# EAGLE board BatteryPCB2997 (EAGLE 7.2.0)
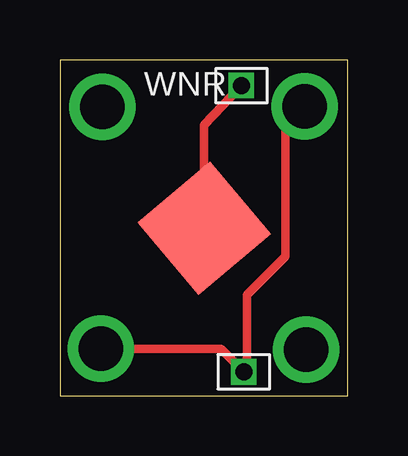
[diagram p0: board, top side]
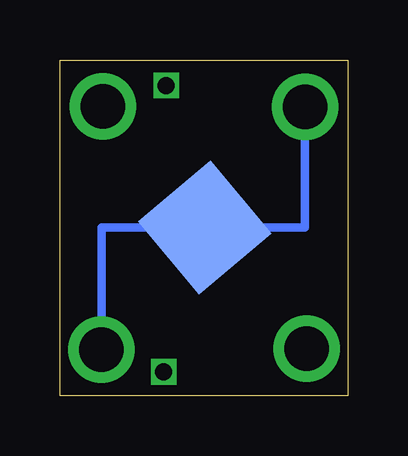
[diagram p1: board, bottom side, seen from below]

Size 12 x 14 mm. Coordinates in mm from the lower left corner, seen from the top.
Outline: 0,0 12,0 12,14 0,14 0,0
Copper layers (1*16): Top 0.035mm / dielectric 1.5mm / Bottom 0.035mm
Design rules "MF_Standard_2_Layer": minimum track width 6mil, minimum drill 12mil, track to track 6mil, track to pad 6mil, pad to pad 6mil, via to via 6mil, smd to smd 0mil, copper to edge 10mil, drill to drill 10mil, minimum pad ring 6mil, minimum via ring 6mil, stop-mask expansion 2mil, vias tented up to drill 25mil, thermal gap 10mil

## Footprints (pad centres in the part's own frame; a part is rotated, then mirrored left to right if it is on the bottom)
SAMTEC_FTS-101-03-S = drill 0.711 square: 1 0,0
2997 = smd 3.96 x 3.96: NEG 0,0 | drill 1.85: P0S2 6.605,0; POS1 -6.605,0

## Placement (x,y rotation side)
GND  FTS-101-03-L-S  [SAMTEC_FTS-101-03-S]  7.57,12.93 90 top
U$3  2997  [2997]  5.96,7.01 130 bottom
U$4  2997  [2997]  6.02,6.98 130 top
VDD  FTS-101-03-L-S  [SAMTEC_FTS-101-03-S]  7.67,0.99 90 top

## Library data of the parts
GND VDD = samtec_fts
U$3 U$4 = keystone-battery-holder

## Nets
N$1: U$3.NEG U$4.P0S2 U$4.POS1
N$2: GND.1 U$4.NEG
N$3: U$3.P0S2 U$3.POS1 VDD.1

## Tracks (layer width: path | path; a pad name or v marks a point on that pad's centre or on a via)
N$1
  Bottom 0.356: U$4.P0S2 1.77,7.01 U$3.NEG 10.27,7.01 U$4.POS1
N$2
  Top 0.356: U$4.NEG 6.02,11.28 GND.1
N$3
  Top 0.356: U$3.P0S2 9.4,12.07 9.4,5.8 7.8,4.2 7.8,0.86 VDD.1 6.71,1.95 U$3.POS1

## Text on the board
tPlace: WNR